# Altium PCB jubeat_io_board.PcbDoc
Units mil, origin at the board's own origin, x right, y up, seen from the top; angles counter-clockwise.
Board outline 1968.5 x 3937.01 mil, 2 copper layers (Top Layer, Bottom Layer); 25 components, 18 nets, 132 pads, 0 vias.
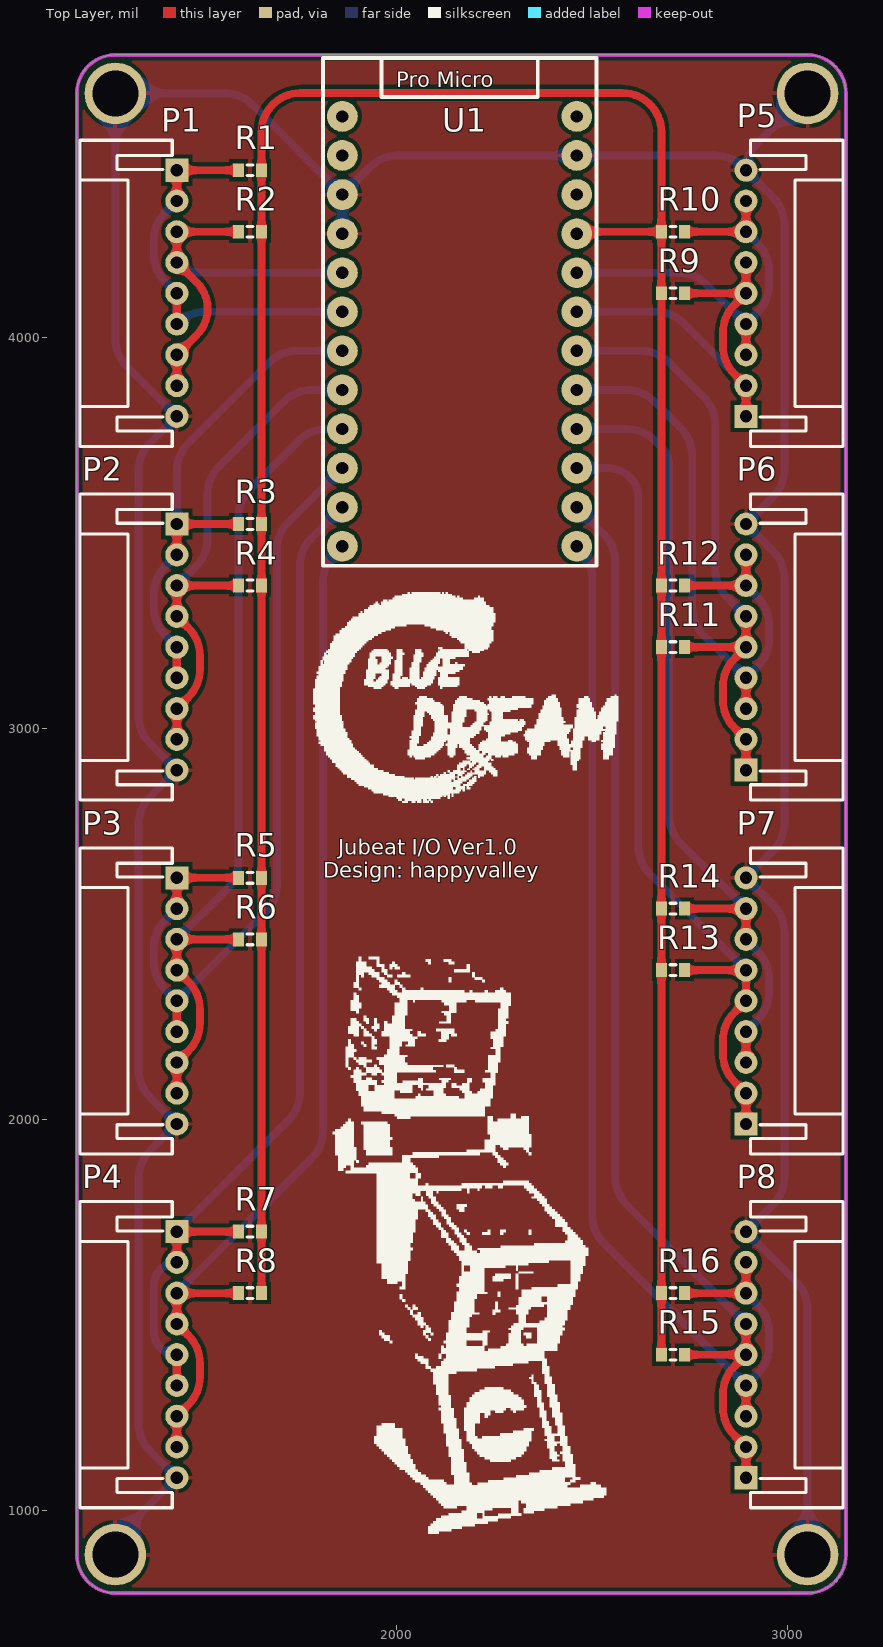
[diagram p0: Top Layer view]
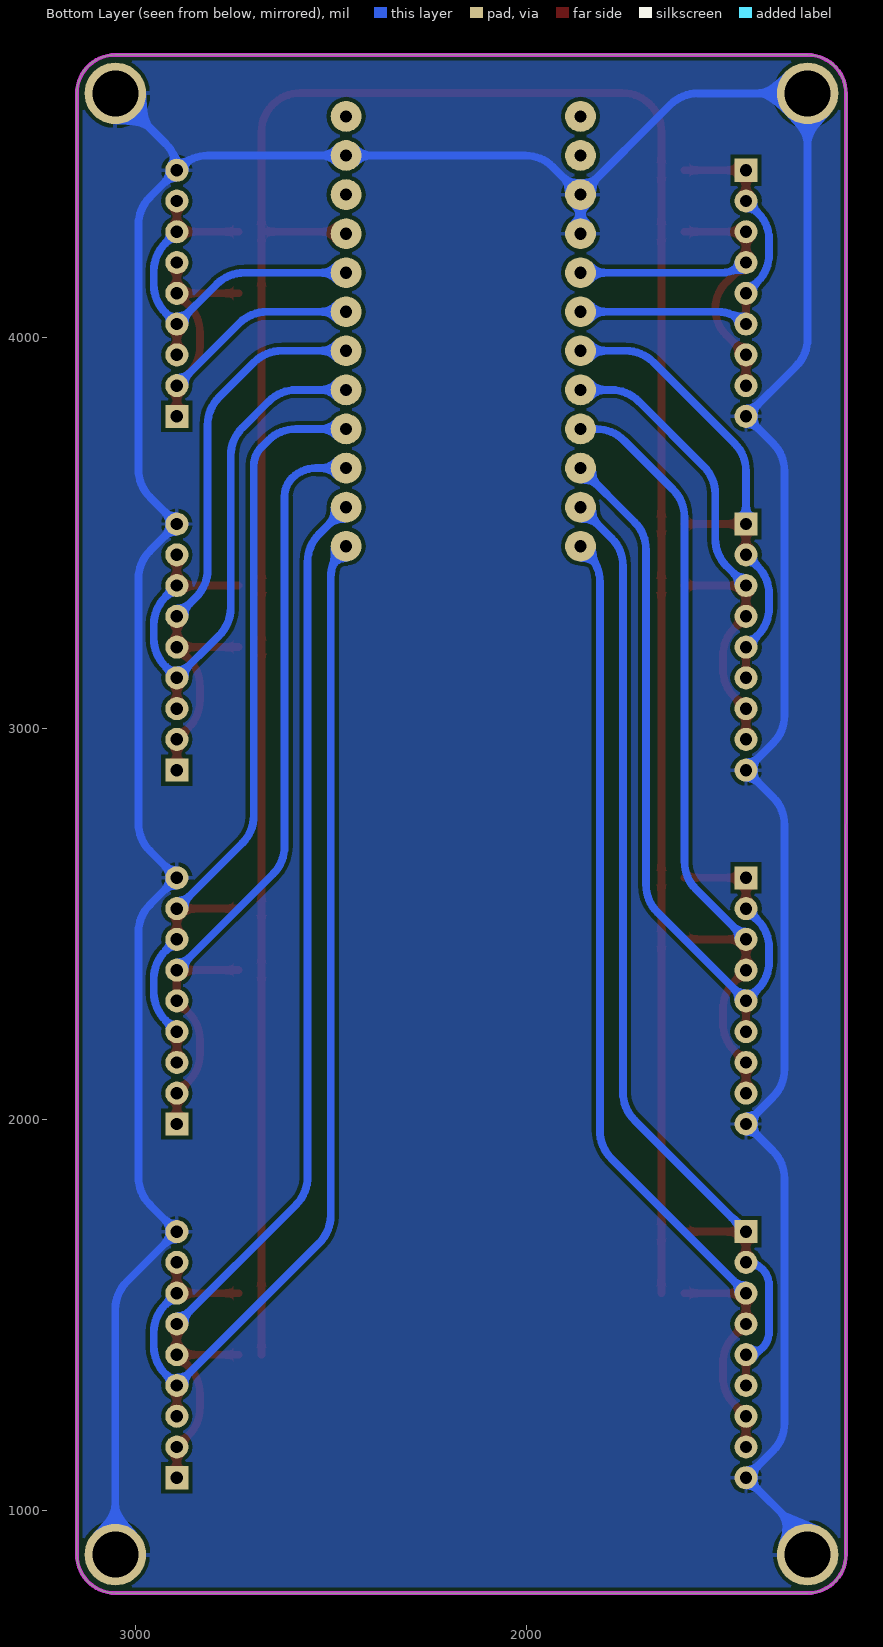
[diagram p1: Bottom Layer view, seen from below]

## Layer stack, top to bottom
Top Solder: solder mask 0.4, Solder Resist, Dk 3.5
Top Layer: signal copper 1.4
Dielectric 1: dielectric 12.6, FR-4, Dk 4.8
Bottom Layer: signal copper 1.4
Bottom Solder: solder mask 0.4, Solder Resist, Dk 3.5

## Board outline
1181.1,885.83 ccw(c1279.53,885.83) 1279.53,787.4 3051.18,787.4 ccw(c3051.18,885.83) 3149.61,885.83 3149.61,4625.98 ccw(c3051.18,4625.98) 3051.18,4724.41 1279.53,4724.41 ccw(c1279.53,4625.98) 1181.1,4625.98

## Design rules (kind name [scope] priority, off if disabled: settings)
Clearance [All] p1: gap=10 ignorepadtopadclearanceinfootprint=TRUE
PolygonConnect [All] p1: connectstyle=Relief reliefconductorwidth=10 reliefentries=4 polygonreliefangle="90 Angle" airgapwidth=10
RoutingVias [All] p1: holewidth=28 width=50 viastyle="Through Hole" minholewidth=28 minwidth=50 maxholewidth=28 maxwidth=50
SolderMaskExpansion [All] p1: expansion=4
Width [All] p1: maxlimit=20 minlimit=10 preferedwidth=20
30 further rules are at their usual default settings.

## Components (designator, comment, footprint, x,y, rotation, side; value= is the part's Value field where it differs from the comment)
P1 "key_in(1/2)" PH2.0-WI-9P 1437.01,4114.17 r270 top
P2 "key_in(3/4)" PH2.0-WI-9P 1437.01,3208.66 r270 top
P3 "key_in(5/6)" PH2.0-WI-9P 1437.01,2303.15 r270 top
P4 "key_in(7/8)" PH2.0-WI-9P 1437.01,1397.64 r270 top
P5 "key_in(9/10)" PH2.0-WI-9P 2893.7,4114.17 r90 top
P6 "key_in(11/12)" PH2.0-WI-9P 2893.7,3208.66 r90 top
P7 "key_in(13/14)" PH2.0-WI-9P 2893.7,2303.15 r90 top
P8 "key_in(15/16)" PH2.0-WI-9P 2893.7,1397.64 r90 top
R1 "Res3" J1-0603 1624.02,4429.13 r0 top value=10K
R2 "Res3" J1-0603 1624.02,4271.65 r0 top value=10K
R3 "Res3" J1-0603 1624.02,3523.62 r0 top value=10K
R4 "Res3" J1-0603 1624.02,3366.14 r0 top value=10K
R5 "Res3" J1-0603 1624.02,2618.11 r0 top value=10K
R6 "Res3" J1-0603 1624.02,2460.63 r0 top value=10K
R7 "Res3" J1-0603 1624.02,1712.6 r0 top value=10K
R8 "Res3" J1-0603 1624.02,1555.12 r0 top value=10K
R9 "Res3" J1-0603 2706.69,4114.17 r0 top value=10K
R10 "Res3" J1-0603 2706.69,4271.65 r0 top value=10K
R11 "Res3" J1-0603 2706.69,3208.66 r0 top value=10K
R12 "Res3" J1-0603 2706.69,3366.14 r0 top value=10K
R13 "Res3" J1-0603 2706.69,2381.89 r0 top value=10K
R14 "Res3" J1-0603 2706.69,2539.37 r0 top value=10K
R15 "Res3" J1-0603 2706.69,1397.64 r0 top value=10K
R16 "Res3" J1-0603 2706.69,1555.12 r0 top value=10K
U1 "Pro Micro" "PRO MICRO" 1810.63,4716.93 r0 top

## Footprints (in the part's own frame and the unit in brackets; to place one, negate y for a bottom-side part, rotate by r counter-clockwise, add the part's x,y. Pads: shape width x height; smd on the part's side, far side on the other; paste and mask are expansions set on the pad)
J1-0603 [mm] "Chip Resistor, Body 1.6x0.8mm, IPC High Density"
  rect 0.7x0.9 smd: 1(-0.75,0) 2(0.75,0)
  silkscreen extent -0.2,-0.35 0.2,0.35, body extent -0.85,-0.48 0.85,0.48, height 0.9
PH2.0-WI-9P [mm] "长：19.9mm，宽：6mm，高：4.7mm"
  rect 1.5x1.5 hole 0.8: 1(-8,0)
  round 1.5 hole 0.8: 2(-6,0) 3(-4,0) 4(-2,0) 5(0,0) 6(2,0) 7(4,0) 8(6,0) 9(8,0)
  silkscreen extent -9.95,-6.3 9.95,-0.3, body extent -9.95,-6.3 9.95,0.3, height 4.75
"PRO MICRO" [mm]
  round 2 hole 0.8: 1(1.27,-3.81) 2(1.27,-6.35) 3(1.27,-8.89) 4(1.27,-11.43) 5(1.27,-13.97) 6(1.27,-16.51) 7(1.27,-19.05) 8(1.27,-21.59) 9(1.27,-24.13) 10(1.27,-26.67) 11(1.27,-29.21) 12(1.27,-31.75) 13(16.51,-31.75) 14(16.51,-29.21) 15(16.51,-26.67) 16(16.51,-24.13) 17(16.51,-21.59) 18(16.51,-19.05) 19(16.51,-16.51) 20(16.51,-13.97) 21(16.51,-11.43) 22(16.51,-8.89) 23(16.51,-6.35) 24(16.51,-3.81)
  silkscreen extent 0,-33.02 17.78,0

## Part data
P1 P2 P3 P4 P5 P6 P7 P8: library part key_in, "Button PCB Board Connector, PH2.00mm"
R1 R2 R3 R4 R5 R6 R7 R8 R9 R10 R11 R12 R13 R14 R15 R16: "Resistor", LatestRevisionDate=29-May-2009, LatestRevisionNote="IPC-7351 Footprint Added.", PackageDescription="Chip Resistor", PackageReference=J1-0603, Published=8-Jun-2000, Publisher="Altium Limited"
U1: "Pro Micro Arduino Board"

## Free pads (board coordinates)
  round 157.48 hole 118.11: 1(1279.53,4625.98) 2(1279.53,885.83) 3(3051.18,885.83) 4(3051.18,4625.98)

## Nets (pads, with @x,y where several pads share a name; then routed paths per layer and width w, separated by ;. In a path a pad name is that pad's centre, name@x,y a point inside that pad or via, vN(x,y) a via of type N, cw(c..) or ccw(c..) an arc to the next point about the centre after c; other vN are vias at no path point)
GND: P1.9 P2.9 P3.9 P4.9 P5.9 P6.9 P7.9 P8.9 pad.1 pad.2 pad.3 pad.4 U1.3 U1.4 U1.23 | length 10027.7
  Bottom Layer w20: pad.2 cw(c1374.58,885.83) 1307.37,953.03 P4.9 1367.87,1151.82 cw(c1438.58,1222.53) 1338.58,1222.53 1338.58,1848.34 cw(c1438.58,1848.34) 1367.87,1919.05 P3.9 1367.87,2057.32 cw(c1438.58,2128.03) 1338.58,2128.03 1338.58,2753.85 cw(c1438.58,2753.85) 1367.87,2824.56 P2.9 1367.87,2962.84 cw(c1438.58,3033.55) 1338.58,3033.55 1338.58,3659.36 cw(c1438.58,3659.36) 1367.87,3730.07 P1.9 1308.82,3927.4 cw(c1379.53,3998.12) 1279.53,3998.12 pad.1 1560.15,4625.98 cw(c1560.15,4525.98) 1630.87,4596.69 U1.3 ; U1.4 U1.3 ; pad.3 3051.18,1513.69 ccw(c2951.18,1513.69) 3021.89,1584.41 P8.9 2962.84,1781.73 ccw(c2892.13,1852.45) 2992.13,1852.45 2992.13,2478.26 ccw(c2892.13,2478.26) 2962.84,2548.97 P7.9 2962.84,2687.25 ccw(c2892.13,2757.96) 2992.13,2757.96 2992.13,3383.77 ccw(c2892.13,3383.77) 2962.84,3454.49 P6.9 2962.84,3592.76 ccw(c2892.13,3663.47) 2992.13,3663.47 2992.13,4289.29 ccw(c2892.13,4289.29) 2962.84,4360 P5.9 ; pad.4 2921.54,4496.34 ccw(c2988.74,4429.13) P5.9 ; U1.3 1931.34,4437.64 cw(c2002.05,4366.93) 2002.05,4466.93 U1.23 2814.48,4466.93 cw(c2814.48,4366.93) 2885.19,4437.64 P5.9
NetP1_1: P1.1 P1.2 P1.5 P1.6 R1.1 U1.6 | length 1024.1
  Top Layer w20: P1.6 1437.01,4074 P1.5 ; P1.2 P1.1 R1.1
  Bottom Layer w20: P1.6 1439.22,4037.64 cw(c1509.93,3966.93) 1509.93,4066.93 U1.6 ; P1.5 1407.24,4143.94 cw(c1477.95,4214.65) 1377.95,4214.65 1377.95,4251.97 cw(c1473,4251.97) 1405.77,4319.15 P1.2
NetP1_3: P1.3 P1.4 P1.7 P1.8 R2.1 U1.5 | length 1038.8
  Top Layer w20: P1.8 P1.7 1487.88,4007.56 ccw(c1420.69,4074.8) 1515.75,4074.8 ccw(c1420.7,4074.8) 1487.91,4142.01 P1.4 P1.3 R2.1
  Bottom Layer w20: P1.4 ccw(c1499.74,4255.64) 1499.74,4166.93 U1.5
NetP2_1: P2.1 P2.2 P2.5 P2.6 R3.1 U1.7 | length 1293.9
  Top Layer w20: P2.6 1437.01,3169 P2.5 ; P2.2 P2.1 R3.1
  Bottom Layer w20: P2.5 1407.24,3238.43 cw(c1477.95,3309.14) 1377.95,3309.14 1377.95,3344.41 cw(c1477.95,3344.41) 1407.24,3415.12 P2.2 ; P2.1 1437.01,3659.37 cw(c1537.01,3659.37) 1466.3,3730.08 1673.86,3937.64 cw(c1744.57,3866.93) 1744.57,3966.93 U1.7
NetP2_3: P2.3 P2.4 P2.7 P2.8 R4.1 U1.8 | length 1325
  Top Layer w20: P2.8 P2.7 1466.77,3080.95 ccw(c1396.06,3151.66) 1496.06,3151.66 1496.06,3186.92 ccw(c1396.06,3186.92) 1466.77,3257.63 P2.4 P2.3 R4.1
  Bottom Layer w20: P2.3 1486.46,3415.59 ccw(c1415.75,3486.31) 1515.75,3486.31 1515.75,3600.31 cw(c1615.75,3600.31) 1545.04,3671.02 1711.66,3837.64 cw(c1782.37,3766.93) 1782.37,3866.93 U1.8
NetP3_1: P3.1 P3.2 P3.5 P3.6 R5.1 U1.10 | length 2122.1
  Top Layer w20: P3.6 1437.01,2263 P3.5 ; P3.2 P3.1 R5.1
  Bottom Layer w20: P3.2 1407.24,2509.6 ccw(c1477.95,2438.89) 1377.95,2438.89 1377.95,2403.62 ccw(c1477.95,2403.62) 1407.24,2332.91 P3.5 1663.62,2529.77 ccw(c1592.91,2600.48) 1692.91,2600.48 1692.91,3457.79 cw(c1792.91,3457.79) 1722.2,3528.5 U1.10
NetP3_3: P3.3 P3.4 P3.7 P3.8 R6.1 U1.9 | length 2108.3
  Top Layer w20: P3.8 P3.7 1466.77,2175.44 ccw(c1396.06,2246.15) 1496.06,2246.15 1496.06,2281.41 ccw(c1396.06,2281.41) 1466.77,2352.12 P3.4 P3.3 R6.1
  Bottom Layer w20: P3.3 1565.2,2588.82 ccw(c1494.49,2659.53) 1594.49,2659.53 1594.49,3541.26 cw(c1694.49,3541.26) 1623.78,3611.97 1749.45,3737.64 cw(c1820.16,3666.93) 1820.16,3766.93 U1.9
NetP4_1: P4.1 P4.2 P4.5 P4.6 R7.1 U1.11 | length 2639.8
  Top Layer w20: P4.6 1437.01,1358 P4.5 ; P4.2 P4.1 R7.1
  Bottom Layer w20: P4.5 cw(c1437.01,1456.69) 1377.95,1456.69 1377.95,1574.8 cw(c1437.01,1574.8) P4.2 ; P4.1 1722.68,1998.27 ccw(c1651.97,2068.98) 1751.97,2068.98 1751.97,3416.85 cw(c1851.97,3416.85) 1781.26,3487.56 U1.11
NetP4_3: P4.3 P4.4 P4.7 P4.8 R8.1 U1.12 | length 2670.2
  Top Layer w20: P4.8 P4.7 1466.77,1269.92 ccw(c1396.06,1340.63) 1496.06,1340.63 1496.06,1375.9 ccw(c1396.06,1375.9) 1466.77,1446.61 P4.4 P4.3 R8.1
  Bottom Layer w20: P4.3 1781.73,1899.84 ccw(c1711.02,1970.56) 1811.02,1970.56 1811.02,3375.9 cw(c1911.02,3375.9) 1840.31,3446.61 U1.12
NetP5_1: P5.1 P5.2 P5.5 P5.6 R9.2 U1.19 | length 1098.5
  Top Layer w20: R9.2 P5.5 ; P5.1 P5.2 2863.93,3907.72 cw(c2934.65,3978.43) 2834.65,3978.43 2834.65,4013.7 cw(c2934.65,4013.7) 2863.94,4084.41 P5.5 ; P5.6 P5.5
  Bottom Layer w20: U1.19 2663.3,4066.93 cw(c2663.3,3966.93) 2734.01,4037.64 P5.2
NetP5_3: P5.3 P5.4 P5.7 P5.8 R10.2 U1.20 | length 1074.7
  Top Layer w20: R10.2 P5.7 P5.8 ; P5.3 P5.4
  Bottom Layer w20: U1.20 2720.78,4166.93 cw(c2720.78,4066.93) 2791.49,4137.64 P5.4 2923.47,4065.2 ccw(c2852.76,4135.91) 2952.76,4135.91 2952.76,4171.18 ccw(c2852.76,4171.18) 2923.47,4241.89 P5.7
NetP6_1: P6.1 P6.2 P6.5 P6.6 R11.2 U1.18 | length 1558.3
  Top Layer w20: R11.2 P6.5 ; P6.1 P6.2 2863.93,3002.2 cw(c2934.65,3072.92) 2834.65,3072.92 2834.65,3108.19 cw(c2934.65,3108.19) 2863.94,3178.9 P6.5 ; P6.6 P6.5
  Bottom Layer w20: U1.18 2625.51,3966.93 cw(c2625.51,3866.93) 2696.22,3937.64 2785.67,3848.19 cw(c2714.96,3777.48) 2814.96,3777.48 2814.96,3407.56 ccw(c2914.96,3407.56) 2844,3337.1 ccw(c2914.96,3407.56) 2844.25,3336.85 P6.6
NetP6_3: P6.3 P6.4 P6.7 P6.8 R12.2 U1.17 | length 1593.7
  Top Layer w20: R12.2 P6.7 P6.8 ; P6.3 P6.4
  Bottom Layer w20: U1.17 2587.71,3866.93 cw(c2587.71,3766.93) 2658.42,3837.64 2726.62,3769.45 cw(c2655.91,3698.74) 2755.91,3698.74 2755.91,3309.14 ccw(c2855.91,3309.14) 2785.19,3238.43 P6.4 2923.47,3159.69 ccw(c2852.76,3230.4) 2952.76,3230.4 2952.76,3265.66 ccw(c2852.76,3265.66) 2923.47,3336.38 P6.7
NetP7_1: P7.1 P7.2 P7.5 P7.6 R13.2 U1.15 | length 2111
  Top Layer w20: R13.2 P7.6 2893.7,2342 P7.5 2863.93,2273.38 ccw(c2934.65,2202.67) 2834.65,2202.67 2834.65,2167.41 ccw(c2934.65,2167.41) 2863.94,2096.7 P7.2 P7.1
  Bottom Layer w20: U1.15 2537.59,3666.93 cw(c2537.59,3580.9) 2598.43,3641.73 cw(c2550.9,3594.21) 2618.11,3594.21 2618.11,2698.9 ccw(c2718.11,2698.9) 2647.4,2628.19 P7.6
NetP7_3: P7.3 P7.4 P7.7 P7.8 R14.2 U1.16 | length 2086.6
  Top Layer w20: R14.2 P7.8 P7.7 ; P7.3 P7.4
  Bottom Layer w20: U1.16 2589.29,3766.93 cw(c2589.29,3666.93) 2660,3737.64 2677.17,3720.47 cw(c2629.64,3672.95) 2696.85,3672.95 2696.85,2777.64 ccw(c2796.85,2777.64) 2726.14,2706.93 P7.8 ; P7.4 2923.47,2254.17 ccw(c2852.76,2324.89) 2952.76,2324.89 2952.76,2360.15 ccw(c2852.76,2360.15) 2923.47,2430.86 P7.7
NetP8_1: P8.1 P8.2 P8.5 P8.6 R15.2 U1.14 | length 2852.8
  Top Layer w20: R15.2 P8.5 ; P8.1 P8.2 2863.93,1191.18 cw(c2934.65,1261.89) 2834.65,1261.89 2834.65,1297.16 cw(c2934.65,1297.16) 2863.94,1367.87 P8.5 ; P8.6 P8.5
  Bottom Layer w20: U1.14 2529.77,3497.79 cw(c2459.06,3427.08) 2559.06,3427.08 2559.06,1852.44 ccw(c2659.06,1852.44) 2588.34,1781.73 P8.6
NetP8_3: P8.3 P8.4 P8.7 P8.8 R16.2 U1.13 | length 2910.3
  Top Layer w20: R16.2 P8.7 P8.8 ; P8.3 P8.4
  Bottom Layer w20: U1.13 2470.71,3456.85 cw(c2400,3386.14) 2500,3386.14 2500,1754.02 ccw(c2600,1754.02) 2529.29,1683.31 P8.4 2923.47,1348.66 ccw(c2852.76,1419.38) 2952.76,1419.38 2952.76,1454.64 ccw(c2852.76,1454.64) 2923.47,1525.35 P8.7
VCC: R1.2 R2.2 R3.2 R4.2 R5.2 R6.2 R7.2 R8.2 R9.1 R10.1 R11.1 R12.1 R13.1 R14.1 R15.1 R16.1 U1.21 | length 7458.3
  Top Layer w20: R8.2 R7.2 R6.2 R5.2 R4.2 R3.2 R2.2 R1.2 1653.54,4527 cw(c1753.54,4527) 1753.54,4627 2577.17,4627 cw(c2577.17,4527) 2677.17,4527 R10.1 ; U1.21 cw(c2465.35,4266.93) 2465.35,4271.65 R10.1 ; R15.1 R16.1 R13.1 R14.1 R11.1 R12.1 R9.1 R10.1
pads on no net: U1.1 U1.2 U1.22 U1.24

## Polygon pours and split planes (outlines as drawn)
GND on Bottom Layer "Bottom Layer-No Net" (solid, remove dead copper, pour order 0): 1161.42,4881.89 1191.18,4852.12 ccw(c1261.89,4922.83) 1261.89,4822.83 3444.88,4822.83 3444.88,966.62 cw(c3344.88,966.62) 3415.59,895.91 3129.92,610.24 ccw(c3082.4,562.71) 3082.4,629.92 787.4,629.92 787.4,4663.3 cw(c887.4,4663.3) 816.69,4734.01 984.25,4901.57 ccw(c1031.78,4949.1) 1031.78,4881.89
GND on Top Layer "Top Layer-No Net" (solid, remove dead copper, pour order 2): 1102.36,4862.2 1112.44,4852.12 ccw(c1183.15,4922.83) 1183.15,4822.83 3740.16,4822.83 3740.16,1124.1 cw(c3640.16,1124.1) 3710.87,1053.39 3149.61,492.13 3139.53,502.21 ccw(c3068.81,431.5) 3068.81,531.5 1043.31,531.5 1043.31,3934.96 ccw(c943.31,3934.96) 1014.02,4005.67 925.2,4094.49 1073.07,4242.36 ccw(c1002.36,4313.07) 1102.36,4313.07

## Keep-outs
Keep-Out Layer:
  the board outline again, w10

## Silkscreen, mask and mechanical layers (free items; w line width, h text height)
Top Overlay:
  drawing of 38 lines, arcs and shapes, not listed
  text "Jubeat I/O Ver1.0" at 1850.39,2677.17 h39.37
  text "Design: happyvalley" at 1811.02,2618.11 h39.37